# Altium PCB STM32P48.PcbDoc
Units mil, origin at the board's own origin, x right, y up, seen from the top; angles counter-clockwise.
Board outline 1969.5 x 1964 mil, 2 copper layers (Top Layer, Bottom Layer); 64 components, 67 nets, 268 pads, 157 vias.
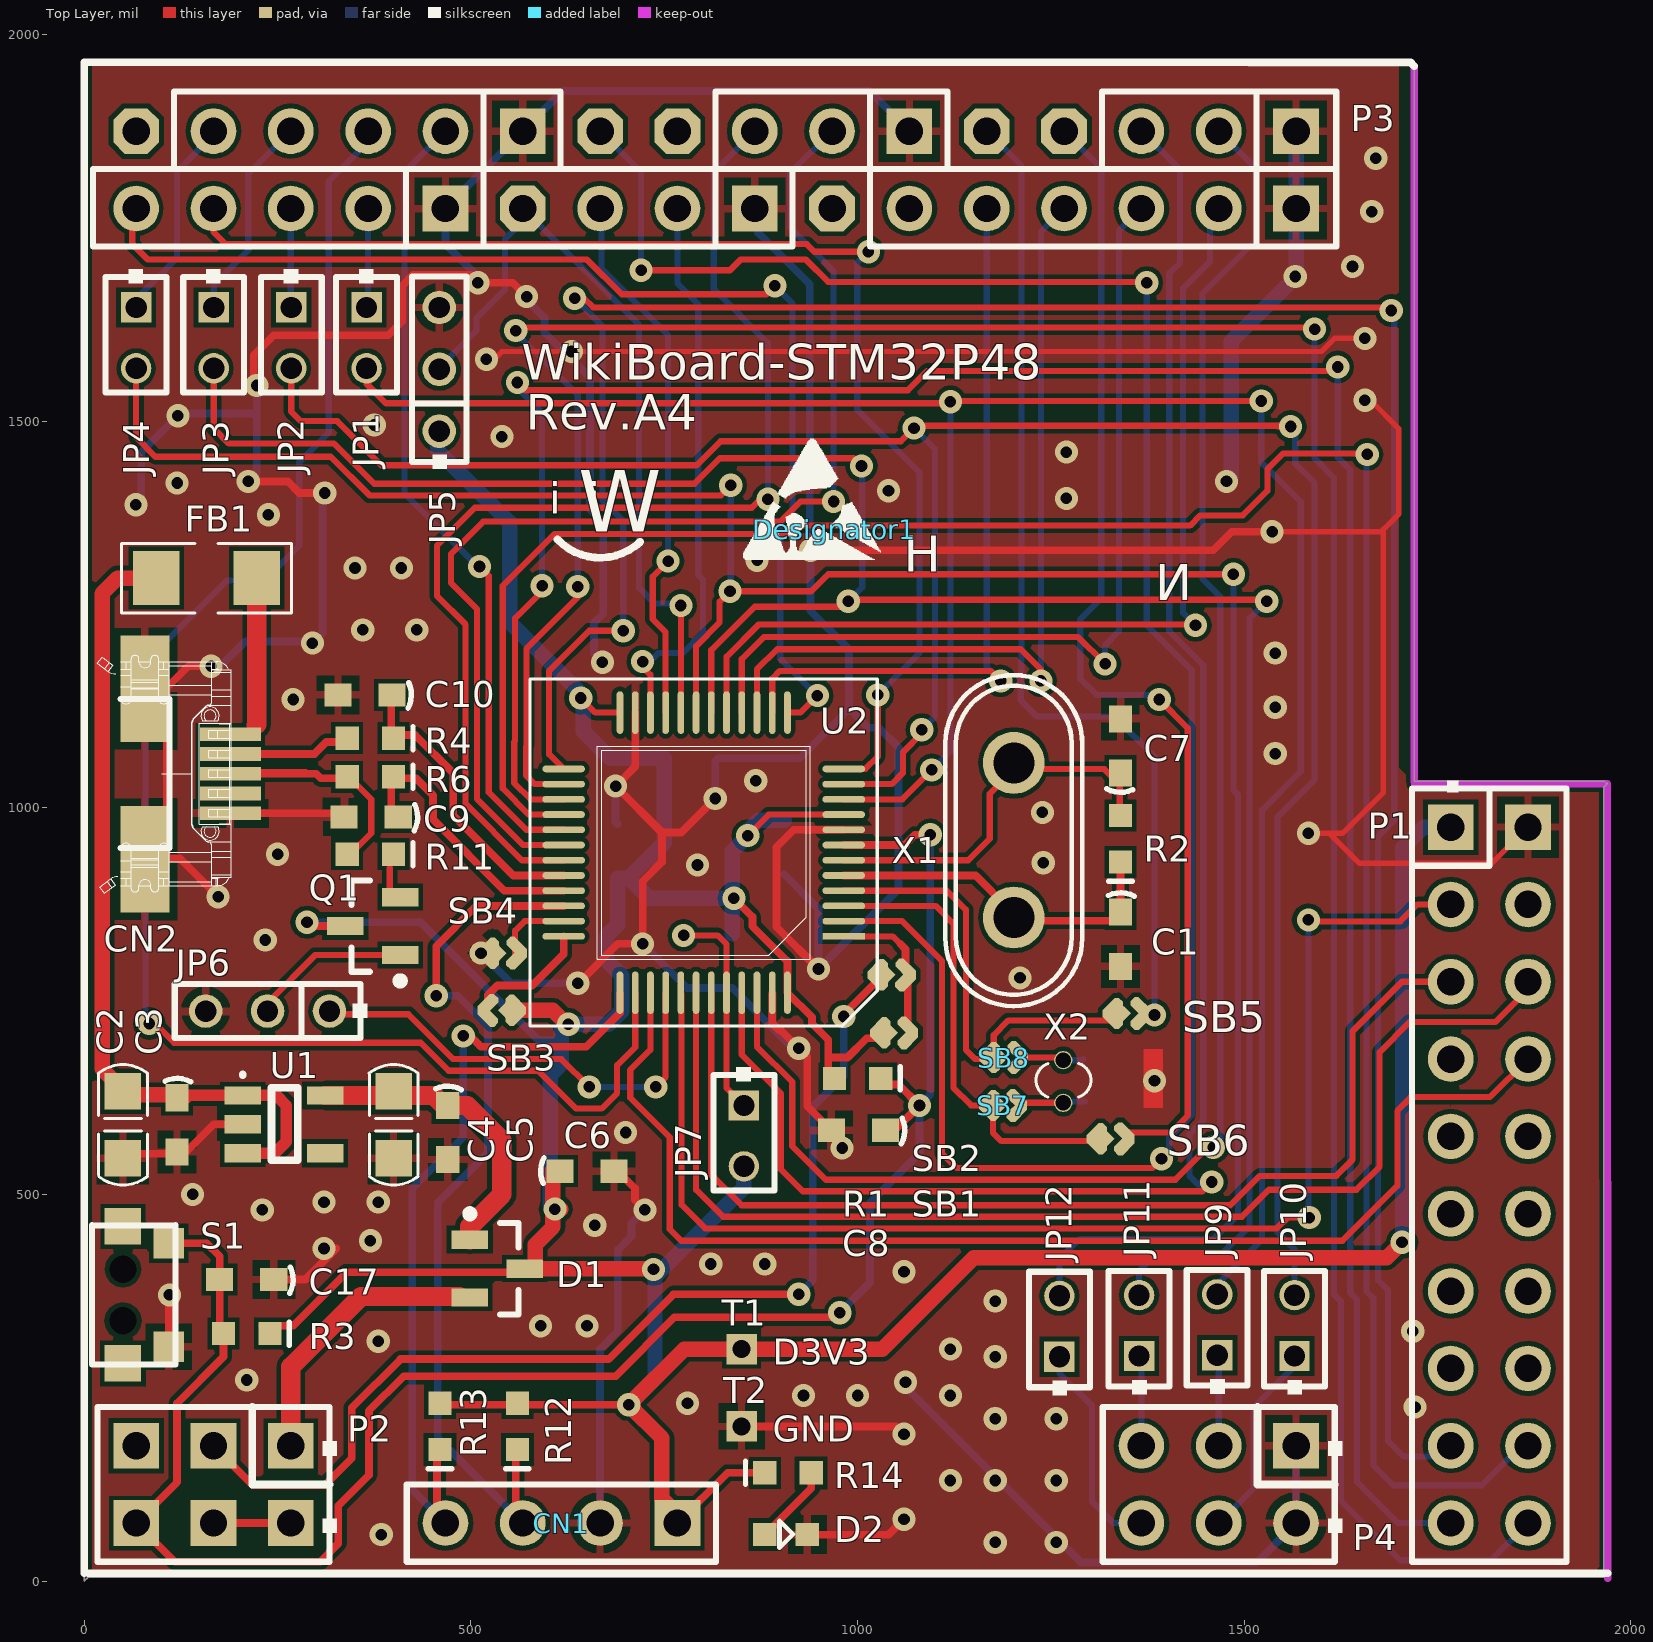
[diagram p0: Top Layer view]
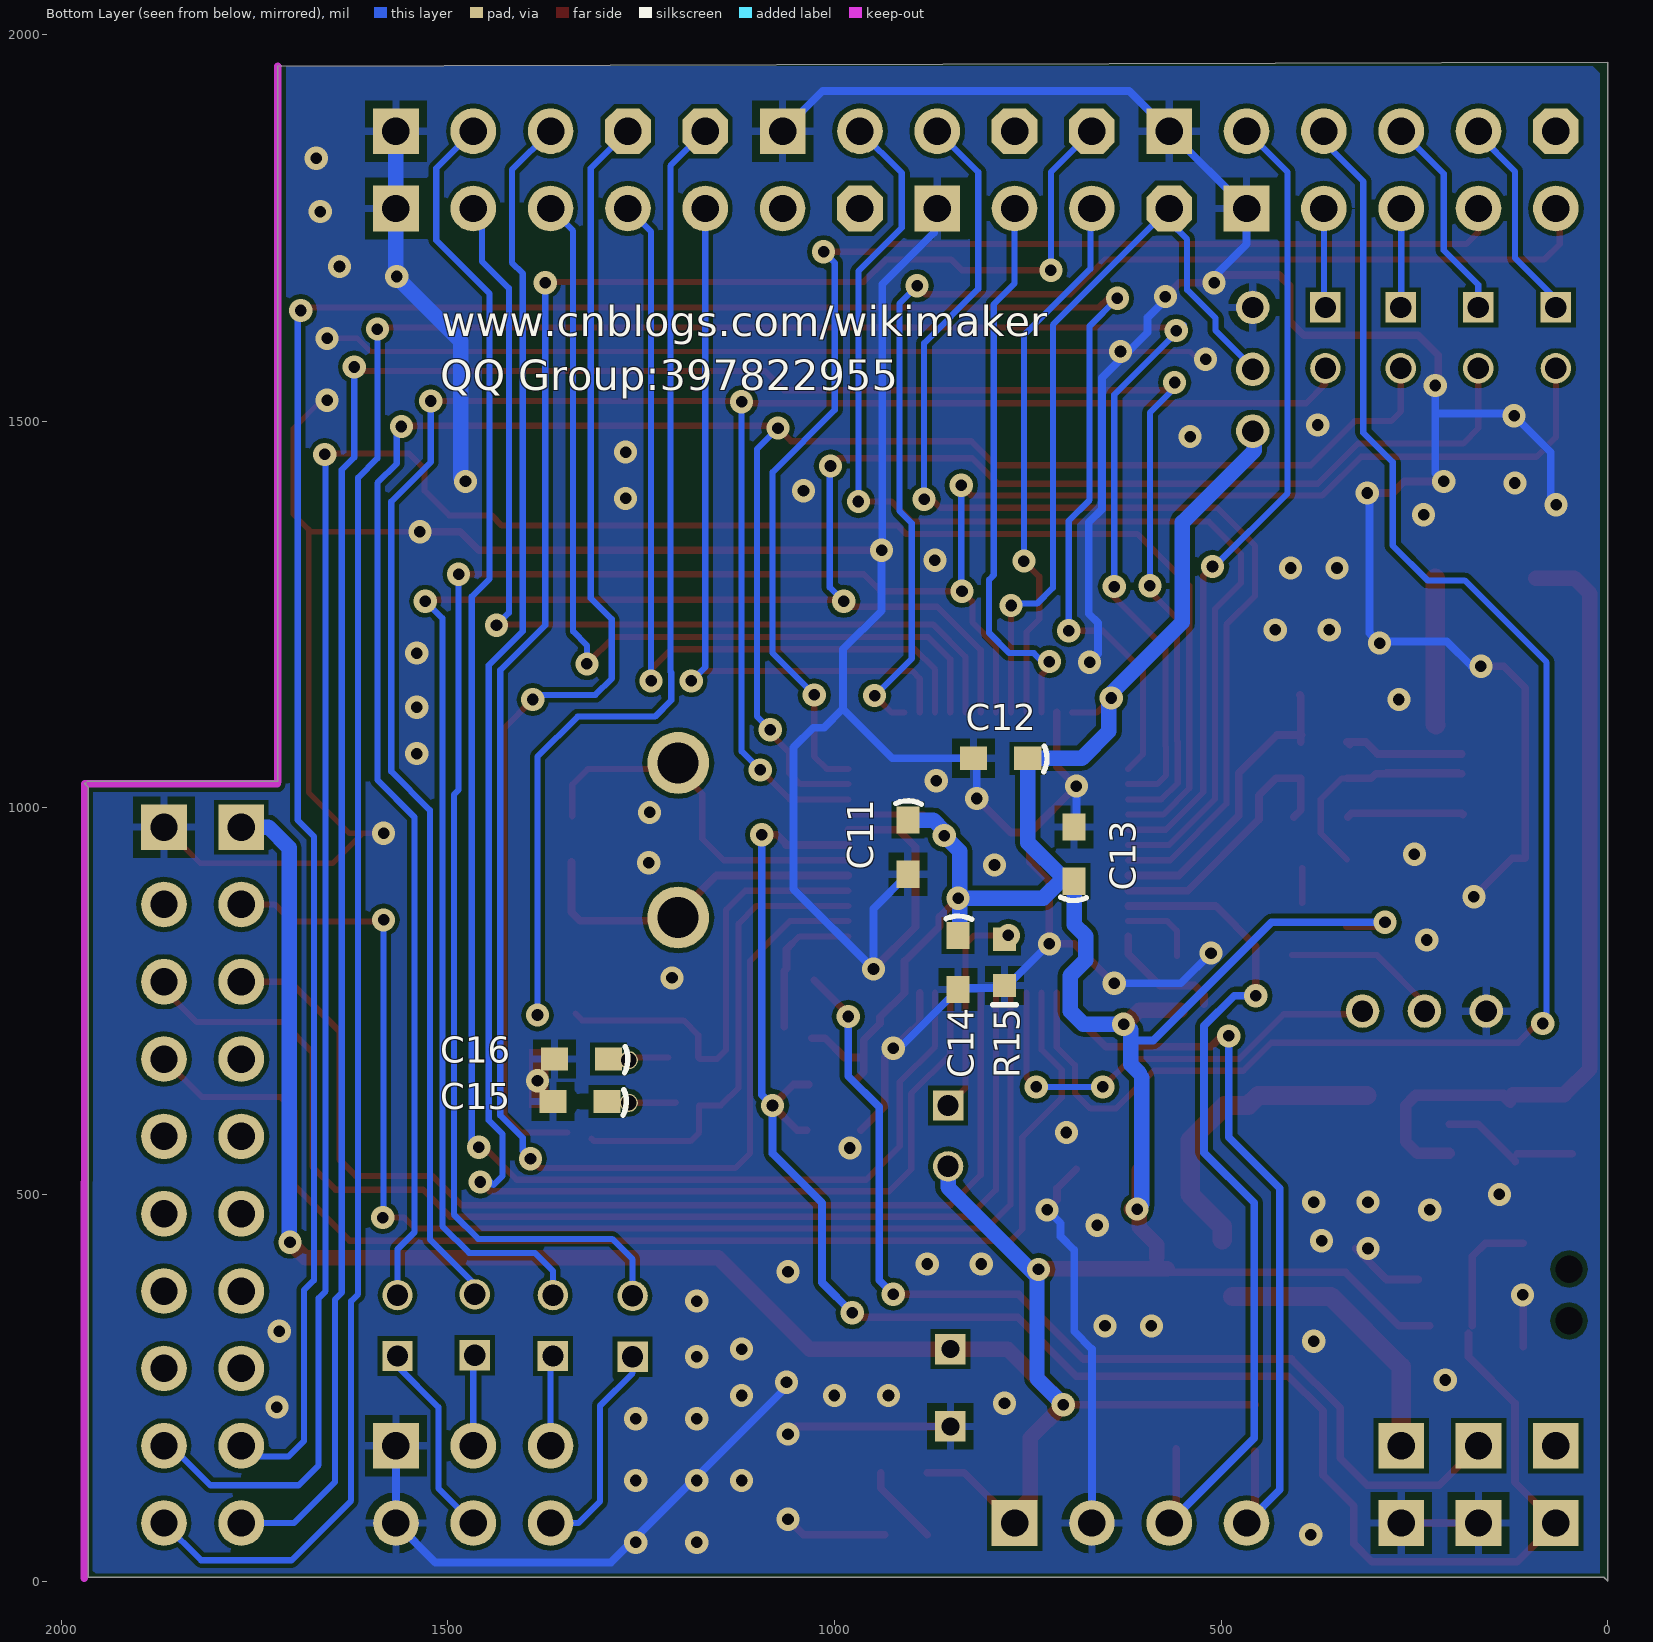
[diagram p1: Bottom Layer view, seen from below]
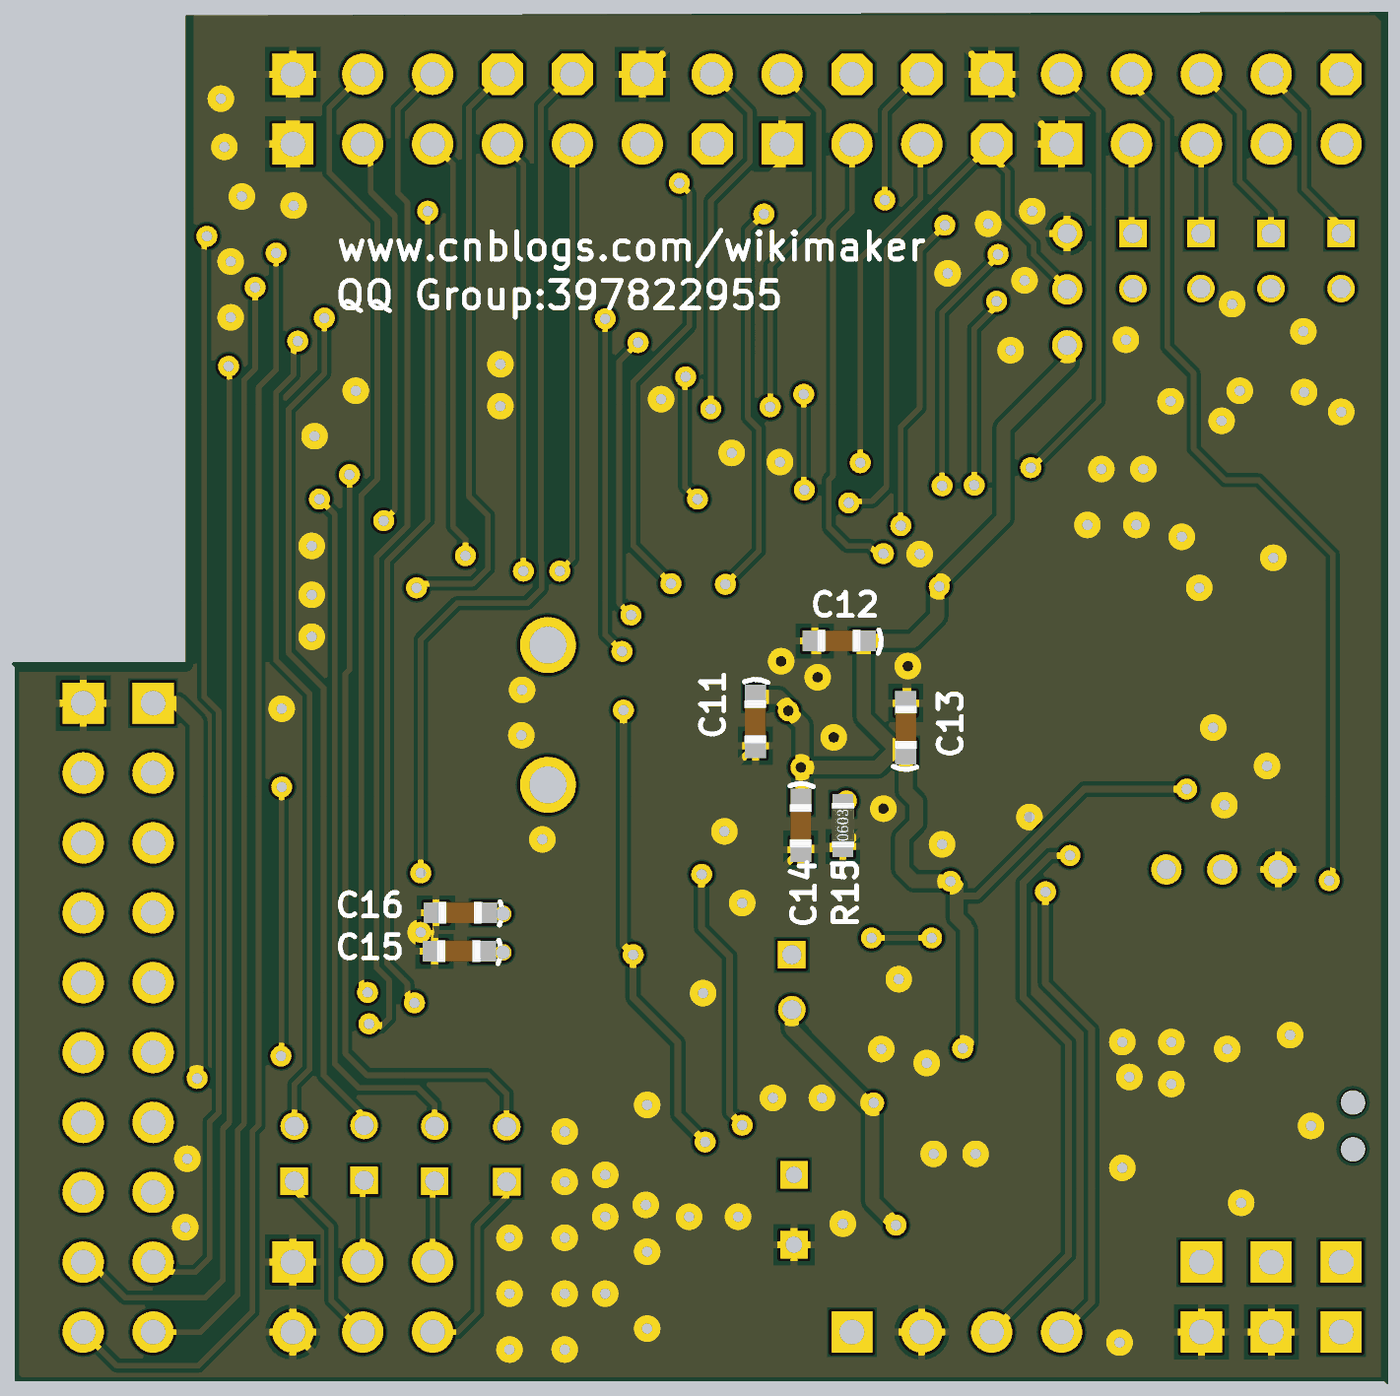
[diagram p2: 3D render of the assembled board from below, using the file's embedded part models]

## Layer stack, top to bottom
Top Solder: solder mask 0.4, Solder Resist, Dk 3.5
Top Layer: signal copper 1.4
Dielectric1: dielectric 12.6, FR-4, Dk 4.8
Bottom Layer: signal copper 1.4
Bottom Solder: solder mask 0.4, Solder Resist, Dk 3.5

## Board outline
1720,1959 1720,1034 1966.5,1034 1969.5,1031 1965,1026.5 1965,5 5,5 0,0 0,1964

## Design rules (kind name [scope] priority, off if disabled: settings)
Clearance Clearance_GND [inpolygon] p1: gap=6
Clearance [All] p2: gap=6
HoleSize [All] p1: absolutevalues=TRUE maxlimit=196.85 minlimit=0 maxpercent=80.000 minpercent=20.000
PolygonConnect PolygonConnect_Via [isvia vs ispolygon] p1: connectstyle=Direct reliefconductorwidth=10 reliefentries=4 polygonreliefangle="90 Angle" airgapwidth=10
PolygonConnect [All] p2: connectstyle=Relief reliefconductorwidth=10 reliefentries=4 polygonreliefangle="90 Angle" airgapwidth=10
RoomDefinition STM32P48 [InComponentClass('STM32P48')] p1: confinementstyle=ConfineIn formatcopy=TRUE lockcomponents=FALSE outline 0,0 1966,0 1966,1964 0,1964
RoutingCorners [All] p1: cornerstyle=45-Degree minsetback=10 maxsetback=100
RoutingVias [All] p1: holewidth=15 width=30 viastyle="Through Hole" minholewidth=12 minwidth=25 maxholewidth=40 maxwidth=50
SilkToSilkClearance [All] p1: silktosilkclearance=0
SilkToSolderMaskClearance SilkscreenOverComponentPads [IsPad] p1: minsilkscreentomaskgap=0 clearancetoexposedcopper=TRUE
SolderMaskExpansion [All] p1: expansion=4
UnpouredPolygon [All] p1: allowunpoured=FALSE
Width [All] p1: maxlimit=200 minlimit=7 preferedwidth=10 minimp=50.000000 maximp=50.000000 favimp=50.000000
25 further rules are at their usual default settings.

## Components (designator, comment, footprint, x,y, rotation, side; value= is the part's Value field where it differs from the comment)
C1 "20pF" C0603L 1340,830 r270 top
C2 "10uF" C0805 50,590 r270 top
C3 "100nF" C0603L 120,590 r270 top
C4 "10uF" C0805 400,590 r270 top
C5 "100nF" C0603L 470,580 r270 top (schematic designator C4)
C6 "100nF" C0603L 650,530 r0 top (schematic designator C4)
C7 "20pF" C0603L 1340,1080 r90 top
C8 "1uF" C0603L 1001,583 r180 top
C9 "22pF" C0603L 371,988 r180 top
C10 "22pF" C0603L 363,1146 r180 top
C11 "100nF" C0603L 905,949 r270 bottom
C12 "100nF" C0603L 785,1064 r0 bottom
C13 "100nF" C0603L 690,940 r90 bottom
C14 "100nF" C0603L 840,800 r270 bottom
C15 "6~10pF" C0603L 1329,620 r0 bottom
C16 "6~10pF" C0603L 1327,675 r0 bottom
C17 "10uF" C0603L 210,390 r180 top
CN1 "HDR1x4" HDR1x4 767,75 r180 top
CN2 "USB-Micro" USB-MICRO-Lite 82,1044 r90 top
D1 "BAT54C" BAT54C 534,404 r0 top
D2 "LED1" 0603PN 880,60 r0 top
Designator1 "Comment" NoTouch 970,1360 r0 top
FB1 "NSMD050" R1206 158,1297 r180 top
JP1 "Jumper2-2" HDR1X2/2.00MM 365,1647 r270 top
JP2 "Jumper2-2" HDR1X2/2.00MM 267.67,1647 r270 top
JP3 "Jumper2-2" HDR1X2/2.00MM 167.33,1647 r270 top
JP4 "Jumper2-2" HDR1X2/2.00MM 67,1647 r270 top
JP5 "Jumper3" HDR1X3/2.00mm 459,1487 r90 top
JP6 "Jumper3" HDR1X3/2.00mm 317,737 r180 top
JP7 "Jumper2-2" HDR1X2/2.00MM 853,615 r270 top
JP9 "Jumper2-2" HDR1X2/2.00MM 1465,292 r90 top
JP10 "Jumper2-2" HDR1X2/2.00MM 1565,291 r90 top
JP11 "Jumper2-2" HDR1X2/2.00MM 1364,291 r90 top
JP12 "Jumper2-2" HDR1X2/2.00MM 1261,290 r90 top
P1 "WIKIGPIO-D" WIKIGPIO-U 1767,975 r270 top
P2 "WIKIPWR" WIKIPWR 267,175 r180 top
P3 "WIKIPRHL-R" HDR2X16-WIKIPRHL-R 1567,1875 r180 top
P4 "Header 3X2" HDR2X3/2.54MM 1567,175 r180 top
Q1 "8050" SOT23-3L(123) 373,847 r180 top
R1 "10K" R0603 1000,650 r180 top
R2 "1M" R0603 1340,960 r90 top
R3 "10K" R0603 210,320 r180 top
R4 "22R" R0603 370,1090 r180 top
R6 "22R" R0603 370,1040 r180 top
R11 "1K5" R0603 370,940 r180 top
R12 "10K" R0603 560,200 r90 top
R13 "10K" R0603 460,200 r90 top
R14 "1K5" R0603 910,140 r0 top
R15 "10K" R0603 780,800 r90 bottom
S1 "" KEY-2x4-SMD 50,370 r90 top
SB1 "Circuit Breaker" JP2_SMD 1047,709 r180 top
SB2 "Circuit Breaker" JP2_SMD 1044,784 r180 top
SB3 "Circuit Breaker" JP2_SMD 540,738 r0 top
SB4 "Circuit Breaker" JP2_SMD 541,812 r180 top
SB5 "Circuit Breaker" JP2_SMD 1348,734 r180 top
SB6 "Circuit Breaker" JP2_SMD 1327,572 r180 top
SB7 "Circuit Breaker" JP2_SMD 1188,615 r180 top
SB8 "Circuit Breaker" JP2_SMD 1189,677 r180 top
T1 "TP" TP 850,300 r0 top
T2 "TP" TP 850,200 r0 top
U1 "LDO" SOT23-5 205,628 r270 top
U2 "STM32F103CxT" LQFP-48 800,941 r180 top
X1 "8MHz" XTAL_socket 1202,958 r90 top
X2 "32KHz-6pF" XTAL0602 1266,646 r270 top

## Footprints (in the part's own frame and the unit in brackets; to place one, negate y for a bottom-side part, rotate by r counter-clockwise, add the part's x,y. Pads: shape width x height; smd on the part's side, far side on the other; paste and mask are expansions set on the pad)
0603PN [mil]
  rect 30x30 smd: 1(0,0) 2(55,0)
  silkscreen extent 19,-17 36,18
BAT54C [mm] "SOT23, 3-Leads, Body 2.9x1.3mm, Pitch 0.95mm, Lead Span 2.5mm, IPC High Density"
  rect 1.2x0.6 smd: 1(-0.9,0.95) 2(-0.9,-0.95) 3(0.9,0)
  silkscreen extent -1.02,-1.5 0.7,1.92, body extent -0.7,-1.5 0.7,1.5, height 1.1
C0603L [mil]
  rect 35x30 smd: 1(-35,0) 2(35,0)
  silkscreen extent -60,-16 -56,18, body extent -31,-16 32,15, height 24
C0805 [mm]
  rect 1.2x1.2 smd: 1(-1.1,0) 2(1.1,0)
  silkscreen extent -1.97,-0.8 1.97,0.8, body extent -0.99,-0.61 1.01,0.59, height 1.2
HDR1X2/2.00MM [mm]
  rect 1x1 hole 0.7: 1(0,0)
  round 1 hole 0.7: 2(2,0)
  silkscreen extent -1.27,-1 2.79,1
HDR1X3/2.00mm [mm] "Connector; Header; 2 Position"
  round 1.1 hole 0.7: 1(0,0) 2(2.032,0) 3(4.064,0)
  silkscreen extent -1.24,-0.89 5.08,0.89
HDR1x4 [mm] "Connector; Header; 4 Position"
  rect 1.5x1.5 hole 0.9: 1(0,0)
  round 1.5 hole 0.9: 2(2.54,0) 3(5.08,0) 4(7.62,0)
  silkscreen extent -1.27,-1.27 8.89,1.27
HDR2X3/2.54MM [mm] "Connector; Header; 3x2 Position"
  rect 1.5x1.5 hole 0.9: 1(0,0)
  round 1.5 hole 0.9: 2(0,2.54) 3(2.54,0) 4(2.54,2.54) 5(5.08,0) 6(5.08,2.54)
  silkscreen extent -1.52,-1.27 6.35,3.81
HDR2X16-WIKIPRHL-R [mm] "Connector; Header; 16x2 Position"
  rect 1.5x1.5 hole 0.9: 1(0,0) 2(0,2.54) 11(12.7,0) 16(17.78,2.54) 21(25.4,0) 24(27.94,2.54)
  round 1.5 hole 0.9: 3(2.54,0) 4(2.54,2.54) 5(5.08,0) 6(5.08,2.54) 8(7.62,2.54) 10(10.16,2.54) 12(12.7,2.54) 13(15.24,0) 15(17.78,0) 18(20.32,2.54) 20(22.86,2.54) 23(27.94,0) 25(30.48,0) 26(30.48,2.54) 27(33.02,0) 28(33.02,2.54) 29(35.56,0) 30(35.56,2.54) 32(38.1,2.54)
  oct 1.5x1.5 hole 0.9: 7(7.62,0) 9(10.16,0) 14(15.24,2.54) 17(20.32,0) 19(22.86,0) 22(25.4,2.54) 31(38.1,0)
JP2_SMD [mil]
  oct 15x30 smd rot 45: 1(-18,-8) 2(18,7)
  oct 15.75x30 smd rot 135: 1(-18,8)
  rect 26x26 smd rot 45: 2(13,0)
  oct 15x30 smd rot 135: 2(18,-7)
KEY-2x4-SMD [mm] "6.8MM,2.8MM,SMD"
  rect 1.2x1.2 smd: 0(-2.25,0) 0(2.25,0)
  rect 1x1 smd: 1(-1.7,-1.5) 2(1.7,-1.5)
  round 0.8 hole 0.9 unplated: MH1(0.85,0) MH2(-0.85,0)
  silkscreen extent -2.29,-1.73 2.29,1.02, body extent -2.28,-1.6 2.29,0.94, height 1.1
LQFP-48 [mm]
  rect 1.4x0.22 smd: 1(-4.625,2.725)
  oval 1.4x0.22 smd: 2(-4.625,2.225) 3(-4.625,1.725) 4(-4.625,1.225) 5(-4.625,0.725) 6(-4.625,0.225) 7(-4.625,-0.275) 8(-4.625,-0.775) 9(-4.625,-1.275) 10(-4.625,-1.775) 11(-4.625,-2.275) 12(-4.625,-2.775) 25(4.575,-2.775) 26(4.575,-2.275) 27(4.575,-1.775) 28(4.575,-1.275) 29(4.575,-0.775) 30(4.575,-0.275) 31(4.575,0.225) 32(4.575,0.725) 33(4.575,1.225) 34(4.575,1.725) 35(4.575,2.225) 36(4.575,2.725)
  oval 0.22x1.4 smd: 13(-2.775,-4.625) 14(-2.275,-4.625) 15(-1.775,-4.625) 16(-1.275,-4.625) 17(-0.775,-4.625) 18(-0.275,-4.625) 19(0.225,-4.625) 20(0.725,-4.625) 21(1.225,-4.625) 22(1.725,-4.625) 23(2.225,-4.625) 24(2.725,-4.625) 37(2.725,4.575) 38(2.225,4.575) 39(1.725,4.575) 40(1.225,4.575) 41(0.725,4.575) 42(0.225,4.575) 43(-0.275,4.575) 44(-0.775,4.575) 45(-1.275,4.575) 46(-1.775,4.575) 47(-2.275,4.575) 48(-2.775,4.575)
  silkscreen extent -5.73,-5.72 5.67,5.67, body extent -4.53,-4.53 4.47,4.47, height 1.45
NoTouch [mil]
  silkscreen extent -118,-39 60,117
R0603 [mil]
  rect 30x30 smd: 1(-30,0) 2(30,0)
  silkscreen extent -55,-15 -55,15, body extent -31,-16 32,15, height 18
R1206 [mil]
  rect 60x70 smd: 1(-65,0) 2(65,0)
  silkscreen extent -110,-45 110,45, body extent -62,-31 63,32, height 24
SOT23-3L(123) [mm] "SOT23, 3-Leads, Body 2.9x1.3mm, Pitch 0.95mm, Lead Span 2.5mm, IPC High Density"
  rect 1.2x0.6 smd: 1(-0.9,0.95) 2(-0.9,-0.95) 3(0.9,0)
  silkscreen extent -1.02,-1.5 0.7,1.92, body extent -0.7,-1.5 0.7,1.5, height 1.1
SOT23-5 [mm]
  rect 0.6x1.2 smd: 1(0,0) 2(0.95,0) 3(1.9,0) 4(1.9,2.7) 5(0,2.7)
  silkscreen extent -0.69,0 2.13,1.8, body extent -0.32,0.7 2.35,2.1, height 1.1
TP [mm] "2.00MM Hole"
  rect 1x1 hole 0.6: 1(0,0)
USB-MICRO-Lite [mm] "Connector; USB2.0, Type B, SM; 5 Position; Right Angle"
  rect 3.5x1.6 smd: 0(-2.802,0.088) 0(2.798,0.088)
  rect 0.45x2 smd: 1(1.298,-2.714) 2(0.648,-2.714) 3(-0.002,-2.714) 4(-0.652,-2.714) 5(-1.302,-2.714)
  silkscreen extent -3.92,-2.74 3.88,1.65
WIKIGPIO-U [mm] "Connector; Header; 9x2 Position"
  rect 1.5x1.5 hole 0.9: 1(0,0) 2(0,2.54)
  round 1.5 hole 0.9: 3(2.54,0) 4(2.54,2.54) 5(5.08,0) 6(5.08,2.54) 7(7.62,0) 8(7.62,2.54) 9(10.16,0) 10(10.16,2.54) 11(12.7,0) 12(12.7,2.54) 13(15.24,0) 14(15.24,2.54) 15(17.78,0) 16(17.78,2.54) 17(20.32,0) 18(20.32,2.54) 19(22.86,0) 20(22.86,2.54)
  silkscreen extent -1.52,-1.27 24.13,3.81
WIKIPWR [mm] "Connector; Header; 3x2 Position"
  rect 1.5x1.5 hole 0.9: 1(0,0) 2(0,2.54) 3(2.54,0) 4(2.54,2.54) 5(5.08,0) 6(5.08,2.54)
  silkscreen extent -1.52,-1.27 6.35,3.81
XTAL0602 [mm]
  round 0.6 hole 0.5: 1(-0.7,0) 2(0.7,0)
  silkscreen extent -0.59,-0.89 0.51,0.9
XTAL_socket [mil]
  round 80 hole 53: 1(100,0) 2(-100,0)
  silkscreen extent -215,-89 214,89

## Part data
C1 C3 C5 C6 C7 C8 C9 C10 C11 C12 C13 C14 C15 C16 C17: library part Cap, "Capacitor"
C2 C4: library part CAP, "Capacitor"
CN1: library part CON4
D1: "DOUBLE SHOTTKEY DIODES"
D2: "Typical RED GaAs LED"
FB1: library part FB, "Ferrite Beads Inductors Impedance:120Ω±25% Rated Current:1500mA DC Resistance:0.095Ω"
JP1 JP2 JP3 JP4 JP7 JP9 JP10 JP11 JP12: "Jumper2"
P1: "Header, 9-Pin, Dual row"
P2: "PWR HDR"
P3: "Header, 16-Pin, Dual row"
P4: "Header, 3-Pin, Dual row"
Q1: "NPN General Purpose Amplifier"
R1 R2 R4 R6 R11 R12 R13 R14 R15: "Resistor"
R3: library part Res2, "Resistor"
S1: library part SW-PB, "Switch"
T1 T2: "Test Point"
U1: library part LDO-SOT23-5, "General LDO SOT23-5"
U2: "Cortex M3, 48-pin LQFP"
X1 X2: library part CRYSTAL, "Crystal"

## Via types
v1: diameter 30, hole 15, Top Layer to Bottom Layer, 157 vias

## Nets (pads, with @x,y where several pads share a name; then routed paths per layer and width w, separated by ;. In a path a pad name is that pad's centre, name@x,y a point inside that pad or via, vN(x,y) a via of type N, cw(c..) or ccw(c..) an arc to the next point about the centre after c; other vN are vias at no path point)
ADCIN0: JP9.1 P4.3 | length 117.8
  Bottom Layer w8: JP9.1 1467,290 P4.3
ADCIN1: JP10.1 P4.4 | length 256.6
  Bottom Layer w8: P4.4 1512,120 1512,225 1565,278 JP10.1
ADCIN8: JP11.1 P4.5 | length 121.5
  Top Layer w8: P4.5@1364,178 P4.5
  Bottom Layer w8: JP11.1 1367,288 P4.5
ADCIN8/TIM3CH3: JP3.2 JP11.2 U2.18 | length 2987.8
  Top Layer w8: JP3.2 167.33,1490.67 187,1471 323,1471 375,1419 789,1419 822,1452 995,1452 v1(1005,1442) ; U2.18 810.83,1203.83 867,1260 981,1260 v1(988,1267) 990,1269 1527,1269 v1(1529,1267)
  Bottom Layer w8: v1(988,1267) 1006,1285 1006,1441 v1(1005,1442) ; JP11.2 1364,401 1387.39,424.39 1472.39,424.39 1507,459 1507,1245 v1(1529,1267)
ADCIN9: JP12.1 P4.6 | length 280
  Bottom Layer w8: JP12.1 1261,269 1303,227 1303,103 1331,75 P4.6
ADCIN9/TIM3CH4: JP4.2 JP12.2 U2.19 | length 3019.6
  Top Layer w8: JP4.2@67,1579.26 67,1479 92,1454 318.79,1454 368.79,1404 823,1404 v1(836,1417) v1@830,1423 ; U2.19 791.14,1209.14 821.6,1239.6 821.6,1266.6 v1(835,1280) 940,1280 962,1302 v1(1486,1302)
  Bottom Layer w8: v1(835,1280) 836,1281 v1(836,1417) ; JP12.2 1261,416 1287.5,442.5 1460.5,442.5 1492,474 1492,1017 1486,1023 v1(1486,1302)
CTS2: JP1.1 P3.26 | length 118.8
  Top Layer w8: JP1.1@367,1659 JP1.1@368,1658
  Bottom Layer w8: P3.26 367,1659 JP1.1@368,1658
CTS2/WKUP/ADCIN0: JP1.2 JP9.2 U2.10 | length 3048.5
  Top Layer w8: JP1.2 365,1548 390,1523 1118,1523 v1(1120,1525) ; JP1.2@368,1551 JP1.2@368,1579.26 ; U2.10 1057.88,1010.88 v1(1096,1049) ; v1@1118,1526 v1@1507,1526 ; v1(1522,1526) v1@1522,1530
  Bottom Layer w8: v1(1096,1049) 1120,1073 v1(1120,1525) ; JP9.2 1465,384 1523,442 1523,997 1573,1047 1573,1396 1522,1447 v1(1522,1526) v1@1522,1530
D3V3: C6.1 C11.1 C12.1 C13.1 C14.1 CN1.1 D1.3 JP5.1 JP7.2 P1.1 Q1.3 R1.2 R3.1 R12.2 R13.2 R14.1 SB1.2 SB3.2 T1.1 U2.9 U2.24 U2.48 | length 5963
  Top Layer w8: v1(642,1142) 660.91,1123.09 U2.24 ; v1(858,964) 885.2,991.2 U2.9
  Top Layer w10: R3.1@230,330 270,330 339.18,399.18 564.61,399.18 D1.3 ; v1(288,852) 293,847 Q1.3 ; R13.2@456,228 v1@694,228 ; CN1.1@760,82 CN1.1@760,94 ; CN1.1 832,140 R14.1 ; v1(840,883) 864,859 864,847 909.25,801.75 U2.48 941.13,729 941.13,720.87 962,700 962,677 ; R1.2 962,658 962,677 ; SB1.2@1029,702 1012,702 987,677 962,677
  Top Layer w20: SB3.2@553,738 606,738 v1@626,718 ; D1.3 735,404 v1(736,403) ; 583.22,417.78 583.22,435.22 606,458 C6.1@606,531 ; v1(608.5,481) v1@616,481 ; CN1.1@760,94 747,107 747,185 v1(704,228) 776,300 1032,300 1150,418 1684,418 v1(1704,438)
  Bottom Layer w8: v1(642,1142) v1@645,1145
  Bottom Layer w10: v1(288,852) 434.82,852 587.82,699 617,699
  Bottom Layer w20: JP5.1@457,1487 457,1462 550,1369 550,1240 645,1145 645,1099 680,1064 C12.1 750,955 C13.1@704,909 ; 602.5,651 602.5,487 v1(608.5,481) ; 605.5,657 617,668.5 617,699 617,713 v1@625,721 ; v1(626,720) 678,720 695,737 695,783 675,803 675,834 690,849 690,909 C13.1@704,909 ; v1(704,228) 738,262 738,394 853,509 JP7.2 ; C14.1@838,837 v1@838,883 ; v1(840,883) v1@838,883 ; v1(858,964) 838,944 v1@838,883 ; v1@858,970 872,984 C11.1 ; v1@1703.5,440.5 1701,438 v1(1704,438) ; v1@1705,439 1705,948 1732,975 P1.1 ; C13.1@704,909 730,883 v1@838,883
EXD3V3: D1.2 P2.1 | length 357.7
  Top Layer w25: P2.1 267,277 358,368 D1.2@485,368
GND: C1.2 C2.2 C3.2 C4.2 C5.2 C6.2 C7.2 C8.2 C9.2 C10.2 C11.2 C12.2 C13.2 C14.2 C15.2 C16.2 C17.1 CN1.2 CN2.0 CN2.5 D2.2 JP5.3 JP6.3 P1.2 P2.2 P2.4 P3.1 P3.2 P3.11 P3.16 P3.21 P3.24 P4.1 P4.2 R15.1 S1.1 SB4.2 T2.1 U1.2 U2.8 U2.23 U2.47 | length 11541.9
  Top Layer w7: v1(520,1580) 520,1570 540,1590 1600,1590 1617,1607 v1(1656,1607) ; v1(1536,1357) 1677,1357 1680,1360 ; v1(1583,967) 1610,967 ; v1(1656,1527) 1663,1527 1700,1490 1700,1380 1680,1360 ; P1.2 1820,928 1649,928 1610,967 ; 1610,967 1627,967 1680,1020 1680,1360
  Top Layer w10: C2.2@46,552.69 C3.2@116.69,552.69 ; S1.1 109.06,369.06 v1(110,370) ; C3.2@119.69,542.69 167.6,590.6 U1.2 ; v1(164,1183) 134.37,1183 106.54,1155.17 106.54,934.7 123.3,934.7 v1(173,885) ; P2.4 251,75 251,59 P2.2@267,59 ; CN2.5@186.86,991.76 CN2.5@187.36,991.26 ; CN2.5 331.24,992.76 C9.2 ; v1(212,1422) 263,1422 278,1407 v1(311,1407) ; v1(223,1546) 219,1550 219,1585 245,1611 393,1611 411,1629 411,1675 425,1689 499,1689 v1(509,1679) 554,1679 v1(572,1661) 572,1669 v1@574,1671 ; C17.1 285.96,390 325.96,430 v1(310,430) ; v1(513,812) v1@513,822 ; v1(638,773) 639,773 690,824 v1(722,824) 722,905 747,930 747,968 ; C6.2@687.35,532.65 712,508 712,493 v1(725,480) ; U2.23 712.4,1053.4 v1(687,1028) 747,968 ; v1(816,1012) 772,968 747,968 ; T2.1 1050,200 v1(1060,190) ; U2.47 889.57,721.43 898.78,712.22 900.78,712.22 v1(924,689) 935,678 935,614 C8.2 ; D2.2 1040,60 v1(1060,80) ; v1(939,1333) 1460,1333 1484,1357 v1(1536,1357) ; v1(949.5,791.5) 895,846 895,949 917.51,971.51 U2.8
  Bottom Layer w10: v1@60,1385 73.5,1398.5 73.5,1459.5 v1(121,1507) 124,1510 223,1510 ; v1(164,1183) 176,1183 208,1215 v1@295,1215 ; v1(212,1422) 223,1433 223,1510 ; v1(223,1546) 223,1510 ; v1(295,1213) 308,1226 v1@308,1395 ; v1(509,1679) 509,1687 467,1729 P3.24 P3.21 619,1927 1015,1927 P3.11 ; v1(513,812) 552,773 v1(638,773) ; v1(572,1661) 568,1661 595,1634 595,1615 654,1556 654,1386 671,1369 671,1251 659,1239 659,1199.26 v1(670,1188.26) ; CN1.2 667,300 690,323 690,428 707.5,445.5 707.5,462.5 v1(725,480) v1@727,478 ; v1(687,1028) 687,982 C13.2@690,979 ; v1(722,824) 779,767 838,767 916,689 v1(924,689) ; v1(816,1012) 816,1060 C12.2 925,1064 989,1128 ; P3.16 871,1771 871,1744 938,1677 938,1334 v1(939,1333) 939,1255 989,1205 989,1128 ; C11.2 949.5,869.5 v1(949.5,791.5) 1053,895 1053,1078 1027.5,1103.5 1013.5,1103.5 989,1128 ; v1@1057,256 1289,24 1516,24 P4.2 P4.1
  Bottom Layer w20: v1@1477,1421 1483,1427 1483,1603 1567,1687 P3.2 P3.1
  other v1: 1178,50 1257,50 384,60 1120,130 1178,130 1257,130 1178,210 1257,210 1721,225 780,230 930,240 1000,240 1120,240 1062,257 210,260 1178,290 1120,300 380,310 1718,323 590,330 650,330 1178,362 1060,400 810,410 880,410 370,440 660,460 230,480 310,490 380,490 140,500 980,560 700,580 1384,647 1210,780 234,829 793,926 1240,929 250,940 1239,994 868.27,1035 1540,1070 1540,1130 270,1140 1540,1200 360,1230 430,1230 350,1310 410,1310 870,1320 238,1379 66.75,1391.75 1270,1400 1040,1410 120,1420 1477,1422 1270,1460 540,1480 375,1495 630,1590 1566,1687 1640,1700 1665,1771 1670,1840
GPIO1: P3.19 U2.2 | length 2776.4
  Top Layer w8: v1@712,1695 835,1695 849,1709 933,1709 962,1680 1365,1680 v1@1366,1679 ; U2.2 1057.6,853.4 1109,802 1109,553 1128,534 1381,534 v1(1393,546)
  Bottom Layer w8: P3.19 720,1822 720,1688 713,1695 v1(720,1695) ; v1@1363.5,1680.5 1372.5,1680.5 v1(1374,1679) 1374,1236 1432,1178 1432,602.21 1403,573.21 1403,556 v1(1393,546)
GPIO2: P1.17 U2.25 | length 3343.7
  Top Layer w8: U2.25 601,1069.13 601,1177 653,1229 v1(697,1229) ; v1(634,1659) 646,1659 658,1647 1686,1647 v1(1690,1643)
  Bottom Layer w8: v1(634,1659) 670,1623 670,1398 697,1371 v1(697,1229) ; v1(1690,1643) 1694,1639 1694,984 1673,963 1673,389 1686,376 1686,181 1706,161 1753,161 P1.17
GPIO3: P1.18 U2.28 | length 3103.6
  Top Layer w8: U2.28 574.8,991.2 541,1025 541,1287 608,1354 907,1354 918,1365 1430,1365 1443,1378 1498,1378 1530,1410 1530,1438 1550,1458 1658,1458 v1(1659,1457)
  Bottom Layer w8: v1(1659,1457) 1658,1456 1658,375 1667,366 1667,150 1693,124 1807,124 1858,175 P1.18
GPIO4: P1.19 U2.27 | length 3304.5
  Top Layer w8: v1(560,1550) 570,1540 1065,1540 1090,1565 1621,1565 v1(1621,1570) ; v1(592,1287) 592,1280 557,1245 557,1086.17 556,1085.17 556,1032 577.12,1010.88 U2.27
  Bottom Layer w8: v1(560,1550) 553,1550 592,1511 v1(592,1287) ; v1(1621,1570) 1621,1453 1637,1437 1637,373 1646,364 1646,128 1699,75 P1.19
GPIO5: P1.20 U2.26 | length 3593
  Top Layer w8: v1(558,1617) 554,1621 1589,1621 v1(1591,1619) ; U2.26 582.43,1030.57 571,1042 571,1078.96 572,1079.96 572,1206 644,1278 638,1284 v1(638,1286)
  Bottom Layer w8: v1@548,1624 638,1534 v1(638,1286) ; v1@639,1278 v1@639,1286 ; v1(1591,1619) 1591,1452 1616,1427 1616,371 1625,362 1625,104 1702,27 1819,27 P1.20 P1.20@1854,75
GPIO6: JP5.2 P3.22 U2.20 | length 1008.3
  Top Layer w8: U2.20 v1(771.46,1261.54)
  Bottom Layer w8: JP5.2@457,1567 507,1617 507,1633 544,1670 544,1735 567,1758 P3.22 717.5,1624.5 717.5,1284.5 738,1264 769,1264 v1(771.46,1261.54)
GPIO7: JP6.1 U2.40 | length 582
  Top Layer w8: JP6.1 321,733 419.21,733 477.21,675 617,675 v1(653,639) ; v1(739,639) 751.77,651.77 U2.40
  Bottom Layer w8: v1@660.8,639 v1(739,639)
GPIO10: P3.9 SB5.1 | length 1301.4
  Top Layer w8: SB5.1@1379,739 1384,734 v1(1384,732)
  Bottom Layer w8: P3.9 1212,1830 1212,1175.77 1211,1174.77 1211,1139 1232,1118 1332,1118 1384,1066 v1(1384,732)
GPIO11: P3.7 SB6.1 | length 1496.7
  Top Layer w8: SB6.1@1345,580 1405,580 1427,602 1427,1103 v1(1390,1140)
  Bottom Layer w8: P3.7 1315,1827 1315,1271 1288,1244 1288,1167 1309,1146 1384,1146 v1(1390,1140)
NetC1_1: C1.1 R2.1 U2.5 X1.2 | length 455.1
  Top Layer w10: U2.5 1152.54,912.46 1196,869 X1.2@1196,861 ; X1.2@1196,858 1200,854 1329,854 C1.1 R2.1
NetC2_1: C2.1 C3.1 FB1.2 U1.1 U1.3 | length 1059.9
  Top Layer w15: C3.1@126,619 135,628 U1.1 248,628 261,615 261,568 246.2,553.2 U1.3
  Top Layer w20: FB1.2 43.09,1297 23.05,1276.95 23.05,662.26 56.31,629 C3.1@123,629
NetC4_1: C4.1 C5.1 D1.1 U1.5 | length 398.5
  Top Layer w25: U1.5 452,628 465,615 C5.1 495,615 540,570 540,500 498.57,458.57 D1.1
NetC7_1: C7.1 R2.2 U2.6 X1.1 | length 505.9
  Top Layer w8: U2.6 1143.14,932.14 1171,960 1171,1018 X1.1@1197,1044 ; X1.1@1181.5,1059.5 1183,1061 X1.1@1196,1061 ; X1.1@1196,1058 1204,1050 1319,1050 1339,1030 R2.2@1339,989
NetC15_1: C15.1 SB7.1 X2.2 | length 91.9
  Top Layer w8: SB7.1@1205,619 1205.56,618.44 X2.2 X2.2@1268,618.44
  Bottom Layer w8: X2.2 1267.56,620 C15.1
NetC16_1: C16.1 SB8.1 X2.1 | length 82.1
  Top Layer w8: SB8.1@1214.56,677 X2.1@1268,677
  Bottom Layer w8: X2.1 X2.1@1268,673.56 ; X2.1@1269.44,675 X2.1@1268,673.56 ; C16.1 1290.56,673.56 X2.1@1268,673.56
NetCN2_2: CN2.2 R4.2 | length 159.5
  Top Layer w10: CN2.2 297.53,1069.53 313,1085 337,1085 R4.2@333.53,1081.53
NetCN2_3: CN2.3 R6.2 R11.2 | length 380.9
  Top Layer w8: R11.2@337,933 371,967 371,1011 344,1038 R6.2@337,1038
  Top Layer w10: CN2.3 300.06,1043.94 306,1038 R6.2@337,1038 ; CN2.3@192.92,1045 286,1045
NetD2_1: D2.1 R14.2 | length 104.9
  Top Layer w10: D2.1 940,120 R14.2
NetJP6_2: JP6.2 Q1.1 | length 207.9
  Top Layer w8: JP6.2 237,748 298.6,809.6 Q1.1
NetJP7_1: JP7.1 R15.2 U2.44 | length 282.1
  Top Layer w8: v1(775,835) 819,835 830.51,823.49 U2.44 830.51,637.49 JP7.1
  Bottom Layer w8: R15.2@775,831 v1(775,835)
NetQ1_2: Q1.2 R11.1 | length 45
  Top Layer w8: Q1.2@395,876.97 395,922
NetSB1_1: SB1.1 SB2.1 U2.1 | length 188.1
  Top Layer w8: U2.1 1045.28,833.72 1055,824
  Top Layer w10: 1055,824 1062,817 1062,792 1065,789 SB1.1@1065,717
NetSB5_2: SB5.2 SB8.2 U2.4 | length 590.6
  Top Layer w8: U2.4 1115.23,892.77 1140,868 1140,687 1152,675 1174,675 1176,677 1176,706 1195,725 1326,725 SB5.2@1335,734
NetSB6_2: SB6.2 SB7.2 U2.3 | length 603.8
  Top Layer w8: U2.3 1100.91,873.09 1124,850 1124,638 1147,615 1175,615 1175,580 1186,569 1309,569 1311,569 SB6.2@1314,572
NRST: C8.1 C17.2 P2.6 R1.1 R3.2 S1.2 U2.7 | length 2496.6
  Top Layer w10: S1.2 158.07,436.93 175,420 C17.2 R3.2@175,330 ; R3.2 180,290 120,230 120,128 P2.6 117,25 305,25 328.5,48.5 328.5,97.5 368,137 368,220 413,265 687,265 763,341 971,341 v1(977,347) ; U2.7 1062.83,951.83 1062.83,953.83 1074,965 v1(1094,965) ; R1.1@1033,642 1053,642 v1(1080,615) 1048,583 C8.1
  Bottom Layer w10: v1(977,347) 1016,386 1016,489 1080,553 v1(1080,615) 1094,629 v1(1094,965)
PF6: SB4.1 U2.35 | length 100.7
  Top Layer w8: SB4.1@557,808.31 557,841 569.4,853.4 U2.35
PF7: SB3.1 U2.36 | length 154.8
  Top Layer w10: SB3.1@522,746 522,758 534.26,770.26 560.32,770.26 560.58,770 579,770 619.88,810.88 U2.36
RTS2: JP2.1 P3.28 | length 118.2
  Top Layer w8: JP2.1@267,1658.67 JP2.1@267.67,1658.01
  Bottom Layer w8: P3.28 267,1658.67 JP2.1@267.67,1658.01
RTS2/ADCIN1: JP2.2 JP10.2 U2.11 | length 3135.1
  Top Layer w8: JP2.2 267.67,1512.33 280,1500 327,1500 384,1443 791.79,1443 822.79,1474 1056,1474 v1(1073,1491) ; U2.11 1044,1030.57 1058.72,1045.28 1058.72,1072 1083,1096.28 v1(1083,1101) ; v1@1073,1494 1559,1494 v1(1560,1493) 1543,1493
  Bottom Layer w8: v1(1073,1491) 1100,1464 1100,1118 v1(1083,1101) ; v1(1560,1493) 1566,1482 1566,1445 1591,1420 1591,1036 1543,988 1543,451 1565,429 JP10.2
RXD1: P3.15 U2.31 | length 1486.2
  Top Layer w8: U2.31 565.86,932.14 493,1005 493,1237 456,1274 456,1339 505,1388 863,1388 874,1399 v1(884,1399)
  Bottom Layer w8: P3.15 814,1822 814,1671 884,1601 v1(884,1399)
RXD2: P3.32 U2.13 | length 1524.4
  Top Layer w8: P3.32 62,1770 62,1729 82,1709 650,1709 695,1664 882,1664 v1(893,1675) ; U2.13 926.09,1123.09 v1(948,1145)
  Bottom Layer w8: v1(893,1675) 916,1652 916,1384 900,1368 900,1193 v1(948,1145)
SCL1: P3.5 U2.45 | length 2262.1
  Top Layer w8: U2.45 850.2,680.8 900.5,630.5 900.5,532.5 929,504 1446,504 v1(1458,516)
  Bottom Layer w8: P3.5 1417,1825 1417,1705 1403,1691 1403,1228.21 1447,1184.21 1447,596 1429.23,578.23 1429.23,523.77 1441,512 1445,516 v1(1458,516)
SCL2: P3.20 U2.21 | length 703.6
  Top Layer w8: U2.21 751.77,1227.23 735,1244 735,1299 v1(755,1319)
  Bottom Layer w8: P3.20 669,1773 669,1697 755,1611 v1(755,1319)
SDA1: P3.3 U2.46 | length 2169.1
  Top Layer w8: U2.46 869.88,691.12 915.61,645.39 915.61,636.61 ; 915.5,636.5 915.5,562.5 959,519 1411,519 1453,561 v1(1460,561)
  Bottom Layer w8: P3.3 1515,1827 1515,1734 1446,1665 1446,1296 1469,1273 v1@1469,561
SDA2: P3.18 U2.22 | length 724
  Top Layer w8: v1@718.5,1185.5 732.09,1171.91 U2.22
  Bottom Layer w8: v1(722,1189) 731,1189 742,1200 774,1200 800,1226 800,1295 794,1301 794,1651 767,1678 P3.18
SDCS#: P3.12
SPI1MISO: P3.6 U2.16 | length 1173.8
  Top Layer w8: U2.16 850.2,1192.2 879,1221 1285,1221 v1(1320,1186)
  Bottom Layer w8: v1(1320,1186) 1320,1210 1338,1228 1338,1746 P3.6
SPI1MOSI: P3.4 U2.17 | length 1237.5
  Top Layer w8: U2.17 830.51,1195.51 872,1237 1436,1237 v1(1437,1236)
  Bottom Layer w8: v1(1437,1236) 1421,1252 1421,1672 1455.83,1706.83 P3.4@1455.83,1755.97
SPI1NSS: P3.10 U2.14 | length 967.3
  Top Layer w8: U2.14 889.57,1167 899.57,1177 1172,1177 v1(1185,1164)
  Bottom Layer w8: P3.10 1167,1182 v1(1185,1164)
SPI1SCK: P3.8 U2.15 | length 1082.9
  Top Layer w8: U2.15 869.88,1178.88 896,1205 1211,1205 1237,1179 v1(1237,1164)
  Bottom Layer w8: v1(1237,1164) 1237,1745 P3.8
SWCLK: CN1.4 R13.1 U2.37 | length 1025.5
  Top Layer w10: R13.1@456,168 456,86 CN1.4 ; v1(490,705) 499,705 513,691 649,691 692.72,734.72 U2.37
  Bottom Layer w10: CN1.4 424,118 424,508 490,574 v1(490,705)
SWDIO: CN1.3 R12.1 U2.34 | length 1148.8
  Top Layer w10: v1(455,757) 455,821 507.09,873.09 U2.34 ; R12.1@558,171 558,84 CN1.3
  Bottom Layer w10: v1(455,757) 483,757 522,718 522,554 457,489 457,185 CN1.3
TFT_CS: P1.5 U2.43 | length 1425.1
  Top Layer w8: U2.43 810.83,525.17 850,486 1482,486 1520,524 1619,524 1640,545 1640,711 1704,775 P1.5
TFT_MOSI: P1.3 U2.41 | length 1685.3
  Top Layer w8: U2.41 772.46,759.88 772.46,486.54 803,456 1542,456 1556,470 v1(1584,470) ; v1(1583,855) 1583,853 1702,853 1724,875 P1.3
  Bottom Layer w8: v1(1583,855) 1583,471 v1(1584,470)
TFT_RS/DC: P1.6 U2.42 | length 1563.8
  Top Layer w8: U2.42 791.14,505.86 826,471 1497,471 1532,506 1645,506 1675,536 1675,684 1714,723 1825,723 1867,765 P1.6
TFT_SCK: P1.8 U2.39 | length 1608.8
  Top Layer w8: U2.39 732.09,687 706,660.91 706,625 757,574 757,455 772,440 1627,440 1698,511 1698,608 1715,625 1715,626 1818,626 P1.8
TIM1CH1: P3.23 U2.29 | length 1040.2
  Top Layer w8: v1(511,1312) 523,1300 523,1020 571.49,971.51 U2.29
  Bottom Layer w8: P3.23 414,1822 414,1407 509,1312 v1(511,1312)
TIM2CH1: P3.25 U2.38 | length 2110.7
  Top Layer w8: v1@85,720 85,727 116,696 435,696 471,660 587,660 636,611 669,611 689,631 689,667 712.4,690.4 U2.38
  Bottom Layer w8: v1@79,720 79,1188 185,1294 233,1294 278,1339 278,1447 316,1485 316,1810 367,1861 P3.25 ; v1(84,721) v1@85,720
TIM3CH3: JP3.1 P3.27 | length 258.3
  Bottom Layer w8: JP3.1@167.33,1658.01 167.33,1676.33 212,1721 212,1820 P3.27
TIM3CH4: JP4.1 P3.29 | length 258.4
  Bottom Layer w8: JP4.1@67,1658 120,1711 120,1823 167,1870 P3.29
TXD1: P3.13 U2.30 | length 1519.1
  Top Layer w8: U2.30 567.39,951.83 508,1011.21 508,1257 474,1291 474,1328 516,1370 900,1370 926,1396 v1(969,1396)
  Bottom Layer w8: P3.13 913,1821 913,1750 969,1694 v1(969,1396) v1@973,1396
TXD2: P3.30 U2.12 | length 1652.8
  Top Layer w8: P3.30 167,1745 183,1729 934.21,1729 944.21,1719 v1(1014,1719) ; U2.12 1010,1050.25 1026,1066.25 v1(1026,1146)
  Bottom Layer w8: v1(1014,1719) 999.5,1704.5 999.5,1514.5 1080,1434 1080,1200 v1(1026,1146)
USB5V: CN2.1 FB1.1 | length 190.4
  Top Layer w25: 222,1107 223,1108 FB1.1
USB-DM: C10.1 R4.1 U2.32 | length 392.7
  Top Layer w10: R4.1@396,1094 428,1094 477,1045 477,990 554.54,912.46 U2.32 ; R4.1@397,1085 397,1145 C10.1
USB-DP: C9.1 R6.1 U2.33 | length 355
  Top Layer w10: C9.1 397,997 397,1038 428.89,1038 451,1015.89 451,984.77 543,892.77 U2.33
VBAT: P2.3 SB2.2 | length 1366.8
  Top Layer w10: P2.3 218,124 311,124 346,159 346,224 409,287 678,287 762,371 v1(924,371) ; v1(982,730) 982,733 SB2.2@1026,777
  Bottom Layer w10: v1(924,371) 942,389 942,613 982,653 v1(982,730)
pads on no net: CN2.4 P1.4 P1.7 P1.9 P1.10 P1.11 P1.12 P1.13 P1.14 P1.15 P1.16 P2.5 P3.14 P3.17 P3.31 S1.0 S1.MH1 S1.MH2 U1.4

## Polygon pours and split planes (outlines as drawn)
GND on Bottom Layer "Top Layer-No Net" (solid, remove dead copper, pour order 2): 10,1950 19,1959 1720,1959 1720,1031.5 1720.5,1031 1725,1026.5 1965,1026.5 1965,15 1960,10 10,10
GND on Top Layer "Top Layer-No Net" (solid, remove dead copper, pour order 4): 10,1960 1700,1960 1700,1051.5 1720.5,1031 1725,1026.5 1965,1026.5 1965,25 1960,20 1950,10 10,10

## Keep-outs
Keep-Out Layer:
  lines w10: 1720,1034 1720,1959 ; 1720.5,1031 1969.5,1031 1970,4

## Other copper
Top Layer:
  rectangle net GND: 1370,612 1395,688

## Silkscreen, mask and mechanical layers (free items; w line width, h text height)
Top Overlay:
  lines w7.87: 121,1826 11,1826 11,1726 516,1726 516,1826 516,1926 ; 416,1726 416,1826 ; 514,1726 916,1726 916,1826 ; 816,1726 816,1826 816,1926 1116,1926 1116,1826 ; 1016,1926 1016,1826 ; 1216,1826 916,1826 ; 1316,1826 1316,1926 1619,1926 1619,1833 1619,1733 1619,1726 1016,1726 1016,1826 ; 1516,1726 1516,1826 1516,1926 ; 1618,1826 1016,1826 ; 616,1826 916,1826 ; 616,1826 616,1926 116,1926 116,1826 616,1826
  lines w10: 0,10 0,1964 1715,1964 1720,1959 ; 5,10 1970,10 ; 612,1347 ccw(c667,1399) 719,1344
  text "WikiBoard-STM32P48" at 566,1538 h78.74
  text "Rev.A4" at 571,1473 h78.74
  text "i  i" at 601,1380 h40
  text "W" at 639,1357 h80
  text "H" at 1060,1290 h80
  text "N" at 1433,1253 h80
  text "D3V3" at 890,280 h33.46
  text "GND" at 890,180 h33.46
Bottom Overlay:
  text "www.cnblogs.com/wikimaker" at 1508,1610 h39.37
  text "QQ Group:397822955" at 1510,1540 h39.37
Top Solder:
  rectangle: 1360,610 1410,690